# EAGLE board tiny_v (EAGLE 4.11)
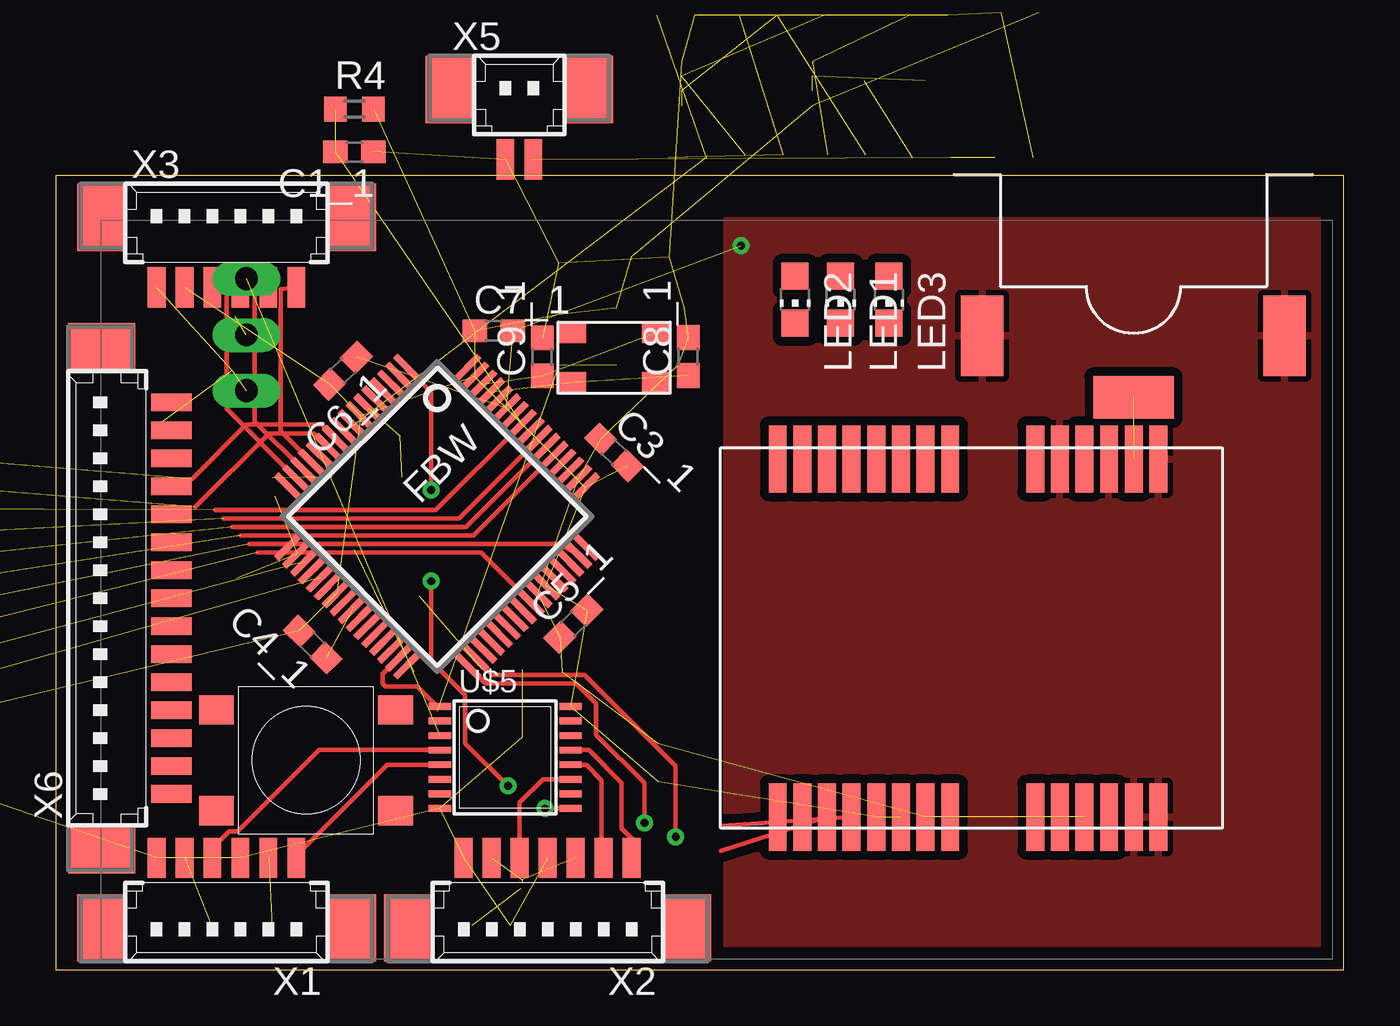
[diagram p0: board, top side]
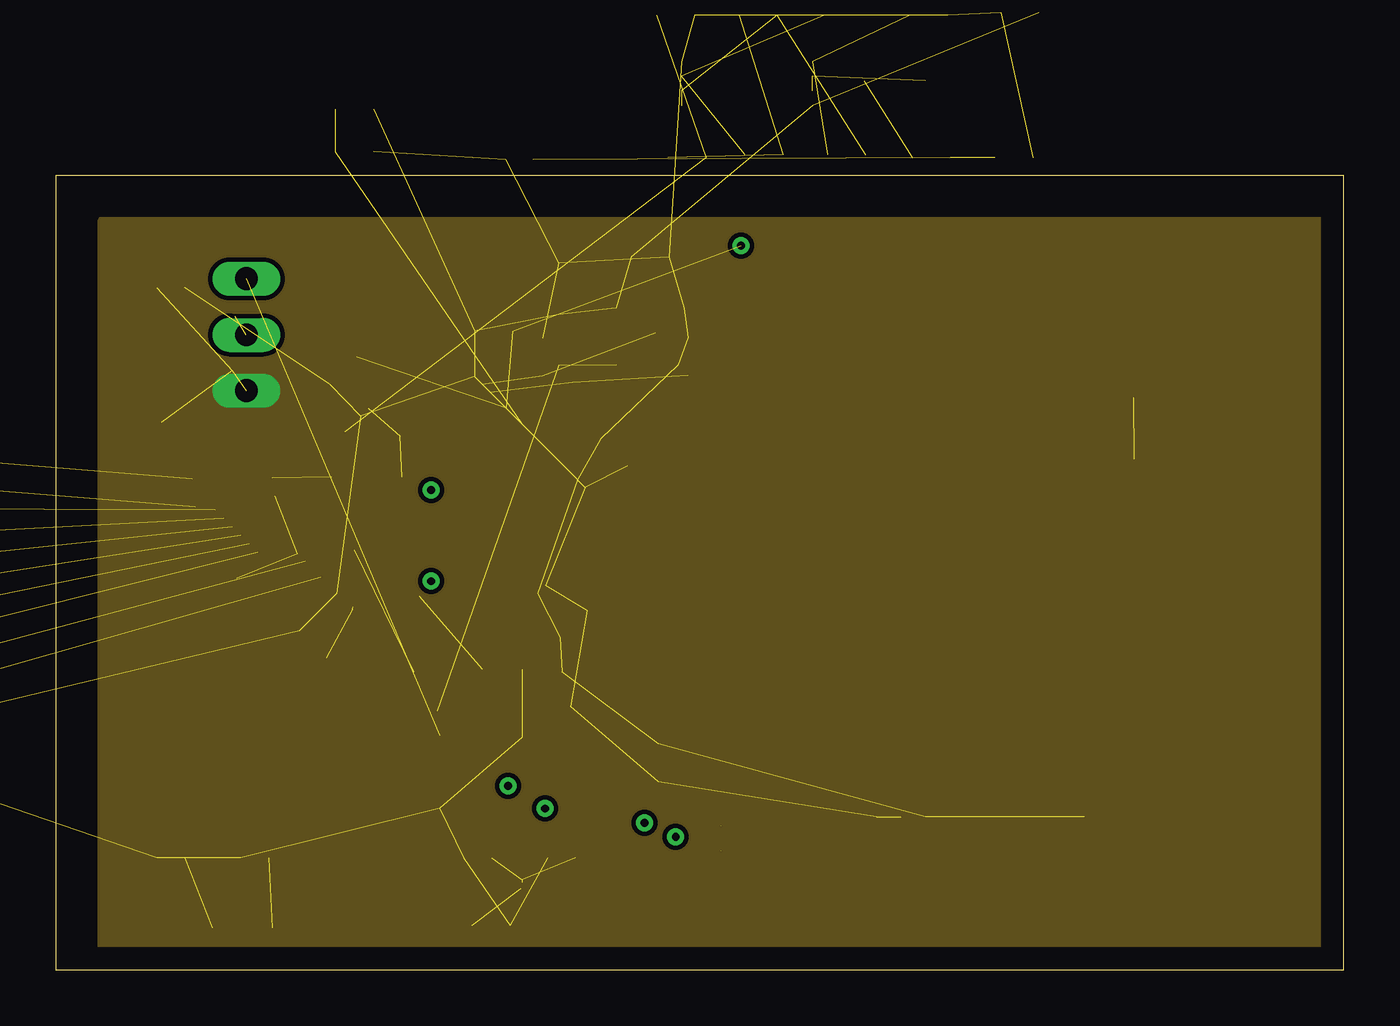
[diagram p1: board, inner layer Route2]
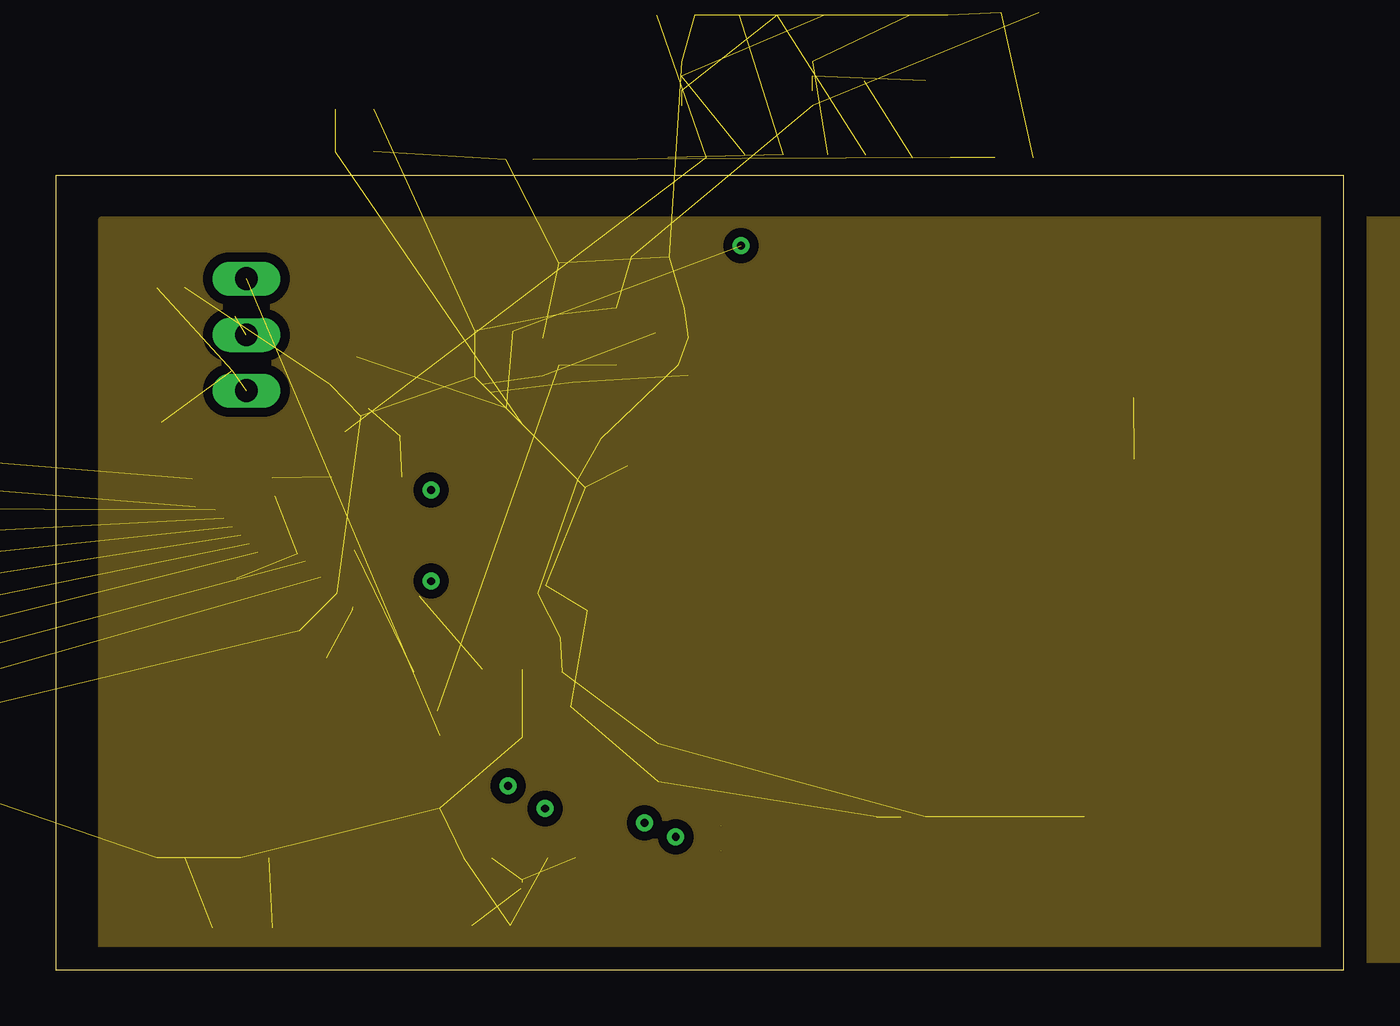
[diagram p2: board, inner layer Route15]
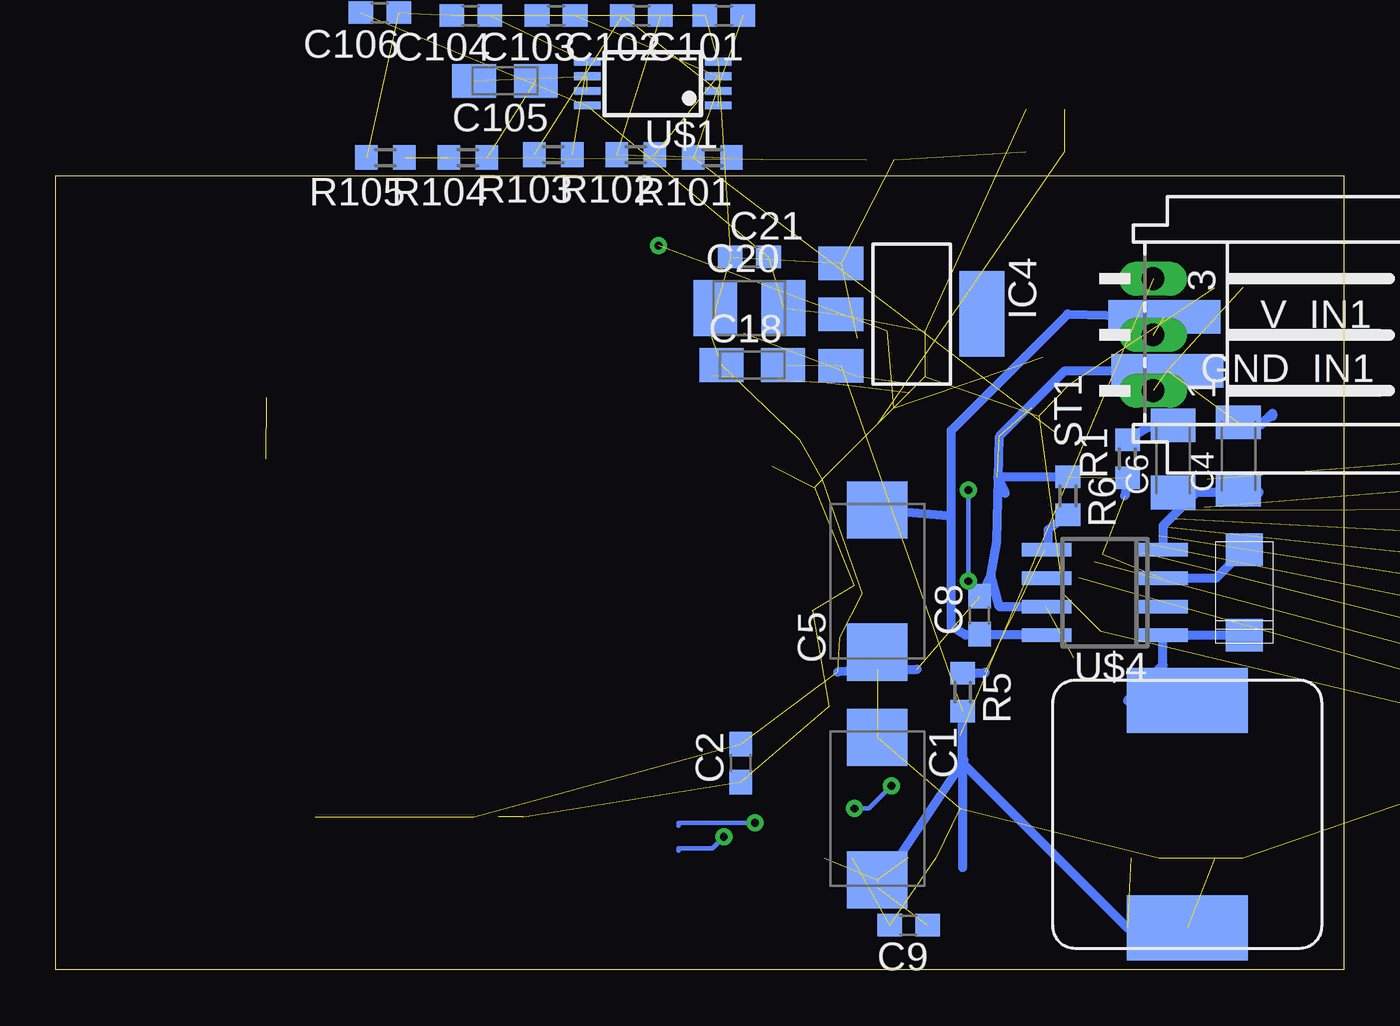
[diagram p3: board, bottom side, seen from below]

Size 57.51 x 35.48 mm. Coordinates in mm from the lower left corner, seen from the top.
Outline: 0,0 57.51,0 57.51,35.48 0,35.48 0,0
Copper layers (1*16): Top 0.035mm / dielectric 1.5mm / Bottom 0.035mm
Design rules "default": minimum track width 10mil, minimum drill 24mil, track to track 8mil, track to pad 8mil, pad to pad 8mil, via to via 8mil, smd to smd 8mil, copper to edge 40mil, drill to drill 8mil, minimum pad ring 10mil, minimum via ring 8mil, stop-mask expansion 4mil, vias tented up to drill 0mil, thermal gap 10mil

## Footprints (pad centres in the part's own frame; a part is rotated, then mirrored left to right if it is on the bottom)
D/7343-31R = smd 2.55 x 2.7: + 3.175,0; - -3.175,0
C0603 = smd 1.1 x 1: 1 -0.85,0; 2 0.85,0
C1206K = smd 1.5 x 2: 1 -1.5,0; 2 1.5,0
A/3216-18R = smd 1.95 x 1.5: + 1.375,0; - -1.375,0
B/3528-21R = smd 1.95 x 2.5: + 1.525,0; - -1.525,0
SQFP-S-10X10-64 = smd 0.3 x 1.6: 1 -3.75,-5.6; 2 -3.25,-5.6; 3 -2.75,-5.6; 4 -2.25,-5.6; 5 -1.75,-5.6; 6 -1.25,-5.6; 7 -0.75,-5.6; 8 -0.25,-5.6; 9 0.25,-5.6; 10 0.75,-5.6; 11 1.25,-5.6; 12 1.75,-5.6; 13 2.25,-5.6; 14 2.75,-5.6; 15 3.25,-5.6; 16 3.75,-5.6; 33 3.75,5.6; 34 3.25,5.6; 35 2.75,5.6; 36 2.25,5.6; 37 1.75,5.6; 38 1.25,5.6; 39 0.75,5.6; 40 0.25,5.6; 41 -0.25,5.6; 42 -0.75,5.6; 43 -1.25,5.6; 44 -1.75,5.6; 45 -2.25,5.6; 46 -2.75,5.6; 47 -3.25,5.6; 48 -3.75,5.6 | smd 1.6 x 0.3: 17 5.6,-3.75; 18 5.6,-3.25; 19 5.6,-2.75; 20 5.6,-2.25; 21 5.6,-1.75; 22 5.6,-1.25; 23 5.6,-0.75; 24 5.6,-0.25; 25 5.6,0.25; 26 5.6,0.75; 27 5.6,1.25; 28 5.6,1.75; 29 5.6,2.25; 30 5.6,2.75; 31 5.6,3.25; 32 5.6,3.75; 49 -5.6,3.75; 50 -5.6,3.25; 51 -5.6,2.75; 52 -5.6,2.25; 53 -5.6,1.75; 54 -5.6,1.25; 55 -5.6,0.75; 56 -5.6,0.25; 57 -5.6,-0.25; 58 -5.6,-0.75; 59 -5.6,-1.25; 60 -5.6,-1.75; 61 -5.6,-2.25; 62 -5.6,-2.75; 63 -5.6,-3.25; 64 -5.6,-3.75
NAPPE_1 = smd 5 x 1.5: P$1 0,0
SOT223 = smd 1.499 x 2.007: 1 -2.261,-3.15; 2 0.025,-3.15; 3 2.311,-3.15 | smd 3.81 x 2.007: 4 0,3.15
WE_PD = smd 2.9 x 5.4: P$1 -5.08,0; P$2 5.08,0
CHIP-LED0805 = smd 1.2 x 1.2: A 0,-1.05; C 0,1.05
R0603 = smd 1 x 1.1: 1 -0.85,0; 2 0.85,0
MSFW3 = drill 1.016 long: 1 0,1.905; 2 2.489,1.905; 3 5.004,1.905
B3S = smd 1.55 x 1.3: P$1 4,-2.25; P$2 -4,-2.25; P$3 4,2.25; P$4 -4,2.25
TSSOP8 = smd 0.35 x 1.2: 1 -0.975,-2.925; 2 -0.325,-2.925; 3 0.325,-2.925; 4 0.975,-2.925; 5 0.975,2.925; 6 0.325,2.925; 7 -0.325,2.925; 8 -0.975,2.925
SMA = smd 1.45 x 1.65: P$1 -1.905,0; P$2 1.905,0
SO08 = smd 0.6 x 2.2: 1 -1.905,-2.6; 2 -0.635,-2.6; 3 0.635,-2.6; 4 1.905,-2.6; 5 1.905,2.6; 6 0.635,2.6; 7 -0.635,2.6; 8 -1.905,2.6
TSSOP16 = smd 0.305 x 0.991: 1 -2.275,-2.918; 2 -1.625,-2.918; 3 -0.975,-2.918; 4 -0.325,-2.918; 5 0.325,-2.918; 6 0.975,-2.918; 7 1.625,-2.918; 8 2.275,-2.918; 9 2.275,2.918; 10 1.625,2.918; 11 0.975,2.918; 12 0.325,2.918; 13 -0.325,2.918; 14 -0.975,2.918; 15 -1.625,2.918; 16 -2.275,2.918
LEA-LA = smd 3 x 0.8: 1 8,-8.65; 2 8,-7.55; 3 8,-6.45; 4 8,-5.35; 5 8,-4.25; 6 8,-3.15; 7 8,-2.05; 8 8,-0.95; 9 8,2.85; 10 8,3.95; 11 8,5.05; 12 8,6.15; 13 8,7.25; 14 8,8.35; 15 -8,8.35; 16 -8,7.25; 17 -8,6.15; 18 -8,5.05; 19 -8,3.95; 20 -8,2.85; 21 -8,-0.95; 22 -8,-2.05; 23 -8,-3.15; 24 -8,-4.25; 25 -8,-5.35; 26 -8,-6.45; 27 -8,-7.55; 28 -8,-8.65
GEOHELIX_SMP = smd 3.6 x 1.9: P$1 -7.2,6.75; P$3 -7.2,-6.75 | smd 1.9 x 3.6: P$2 -9.95,0
CTS_CRYSTAL = smd 1.2 x 0.9: P$1 -1.85,-1.1; P$2 1.85,-1.1; P$3 1.85,1.1; P$4 -1.85,1.1
53398-06 = smd 0.8 x 1.8: 1 3.125,-2.5; 2 1.875,-2.5; 3 0.625,-2.5; 4 -0.625,-2.5; 5 -1.875,-2.5; 6 -3.125,-2.5 | smd 2.1 x 3: S1 5.625,0.625; S2 -5.625,0.625
53398-07 = smd 0.8 x 1.8: 1 3.75,-2.5; 2 2.5,-2.5; 3 1.25,-2.5; 4 0,-2.5; 5 -1.25,-2.5; 6 -2.5,-2.5; 7 -3.75,-2.5 | smd 2.1 x 3: S1 6.25,0.625; S2 -6.25,0.625
53398-12 = smd 0.8 x 1.8: 1 6.875,-2.5; 2 5.625,-2.5; 3 4.375,-2.5; 4 3.125,-2.5; 5 1.875,-2.5; 6 0.625,-2.5; 7 -0.625,-2.5; 8 -1.875,-2.5; 9 -3.125,-2.5; 10 -4.375,-2.5; 11 -5.625,-2.5; 12 -6.875,-2.5 | smd 2.1 x 3: S1 9.375,0.625; S2 -9.375,0.625
53398-02 = smd 0.8 x 1.8: 1 0.625,-2.5; 2 -0.625,-2.5 | smd 2.1 x 3: S1 3.125,0.625; S2 -3.125,0.625
53398-15 = smd 0.8 x 1.8: 1 8.75,-2.5; 2 7.5,-2.5; 3 6.25,-2.5; 4 5,-2.5; 5 3.75,-2.5; 6 2.5,-2.5; 7 1.25,-2.5; 8 0,-2.5; 9 -1.25,-2.5; 10 -2.5,-2.5; 11 -3.75,-2.5; 12 -5,-2.5; 13 -6.25,-2.5; 14 -7.5,-2.5; 15 -8.75,-2.5 | smd 2.1 x 3: S1 11.25,0.625; S2 -11.25,0.625

## Placement (x,y rotation side)
C1  330uF/10V  [D/7343-31R]  20.82,7.2 270 bottom
C1_1  100nF  [C0603]  13.33,36.54 180 top
C2  100nF  [C0603]  26.92,9.23 90 bottom
C3_1  100nF  [C0603]  24.92,23.11 315 top
C4  220pF/50V  [C1206K]  4.69,22.95 90 bottom
C4_1  100nF  [C0603]  11.46,14.53 135 top
C5  47uF/16V  [D/7343-31R]  20.82,17.36 90 bottom
C5_1  100nF  [C0603]  23.11,15.46 45 top
C6  22nF/50V  [C1206K]  7.62,22.82 90 bottom
C6_1  100nF  [C0603]  12.82,26.76 225 top
C7_1  100nF  [C0603]  19.55,28.54 0 top
C8  100nF  [C0603]  16.25,15.84 90 bottom
C8_1  13pF  [C0603]  28.24,27.39 90 top
C9  100nF  [C0603]  19.43,1.99 180 bottom
C9_1  13pF  [C0603]  21.73,27.38 90 top
C18  [A/3216-18R]  26.41,27.01 0 bottom
C20  [B/3528-21R]  26.54,29.55 0 bottom
C21  100nF  [C0603]  26.54,31.84 0 bottom
C101  3,3nF  [C0603]  27.68,42.63 180 bottom  (outside the outline)
C102  220pF  [C0603]  31.36,42.63 180 bottom  (outside the outline)
C103  100pF  [C0603]  35.17,42.63 180 bottom  (outside the outline)
C104  1nF  [C0603]  38.98,42.63 180 bottom  (outside the outline)
C105  10µF  [A/3216-18R]  37.46,39.71 180 bottom  (outside the outline)
C106  100nF  [C0603]  43.05,42.76 180 bottom  (outside the outline)
FBW  LPC2148  [SQFP-S-10X10-64]  17.03,20.24 225 top
GND_IN1  NAP11  [NAPPE_1]  7.87,26.76 180 bottom
IC4  REG1117  [SOT223]  19.3,29.3 270 bottom
L1  15uH  [WE_PD]  6.98,6.95 270 bottom
LED1  [CHIP-LED0805]  35.05,29.93 180 top
LED2  [CHIP-LED0805]  33.02,29.93 180 top
LED3  [CHIP-LED0805]  37.21,29.93 180 top
R1  4.7K  [R0603]  9.65,22.82 90 bottom
R4  10k  [R0603]  13.33,38.44 0 top
R5  10K  [R0603]  17.01,12.41 270 bottom
R6  3.3K  [R0603]  12.31,21.17 270 bottom
R101  100k  [R0603]  28.19,36.28 180 bottom
R102  56k  [R0603]  31.62,36.41 180 bottom
R103  12k  [R0603]  35.3,36.41 180 bottom
R104  56k  [R0603]  39.11,36.28 180 bottom
R105  56k  [R0603]  42.79,36.28 180 bottom
ST1  MSFW3  [MSFW3]  6.6,25.87 90 bottom
SW1  B3S  [B3S]  11.17,9.36 0 top
U$1  AD8552RU  [TSSOP8]  30.86,39.59 90 bottom  (outside the outline)
U$2  STPS2L  [SMA]  4.44,16.85 270 bottom
U$4  L5973D  [SO08]  10.66,16.85 90 bottom
U$5  CD4015B  [TSSOP16]  20.06,9.49 270 top
U$6  LEA-4P  [LEA-LA]  40.89,14.82 270 top
U$8  GEOHELIX  [GEOHELIX_SMP]  48.13,35.52 90 top
U$19  CRYSTAL_CTS  [CTS_CRYSTAL]  24.93,27.34 0 top
V_IN1  NAP11  [NAPPE_1]  8,29.17 180 bottom
X1  [53398-06]  7.62,2.5 180 top
X2  [53398-07]  21.97,2.5 180 top
X3  [53398-06]  7.62,32.98 0 top
X4  [53398-12]  -10.67,16.22 90 top  (outside the outline)
X5  [53398-02]  20.7,38.7 0 top
X6  [53398-15]  2.66,16.6 90 top

## Library data of the parts
C1 C1_1 C2 C3_1 C4 C4_1 C5 C5_1 C6 C6_1 C7_1 C8 C8_1 C9 C9_1 C18 C20 C21 C101-C106 R1 R4-R6 R101-R105 = rcl
FBW L1 SW1 U$1 U$2 U$4-U$6 U$8 U$19 = paparazzi
GND_IN1 V_IN1 = misc_datalogger
IC4 = burr-brown
LED1-LED3 = led
ST1 = con-lumberg
X1-X6 = con-molex

## Nets
+3V3: C2.1 C3_1.2 C4_1.2 C5_1.2 C6_1.2 C7_1.1 C20.+ C21.2 C106.2 FBW.7 FBW.23 FBW.43 FBW.49 FBW.51 FBW.63 IC4.2 R4.2 U$1.8 U$5.16 U$6.5 U$6.6 X3.5 X4.11
+5V: C1.+ C9.1 C18.+ IC4.3 L1.P$2 R5.2 X1.2 X1.5 X2.2 X2.5
ADC_0: FBW.13 X3.1
ADC_1: FBW.14 X3.2
ADC_2: FBW.15 X3.3
ADC_3: X3.4
AGND: C6_1.1 C7_1.2 FBW.59 U$6.13 U$6.14 U$6.15 U$6.17 U$6.19 U$8.P$1 U$8.P$3
AUDIO_OUT: C101.1 FBW.9 R101.2
AUDIO_TX: R104.2 R105.1 X5.1
GND: C1.- C1_1.1 C2.2 C3_1.1 C4.2 C4_1.1 C5.- C5_1.1 C8.2 C8_1.2 C9.2 C9_1.2 C18.- C20.- C21.1 C101.2 C103.2 C104.2 C106.1 FBW.6 FBW.18 FBW.25 FBW.42 FBW.50 GND_IN1.P$1 IC4.1 R1.1 R6.1 R105.2 ST1.1 U$1.4 U$2.P$1 U$4.3 U$4.7 U$5.8 U$6.7 U$6.11 X1.1 X1.4 X2.1 X2.4 X3.6 X4.12 X5.2
LPC_CLOCK: C8_1.1 FBW.61 U$19.P$1
LPC_MISO: FBW.53 X4.6
LPC_MOSI: FBW.54 X4.5
LPC_P0.14: FBW.41 X4.8
LPC_PWM_2: FBW.31 U$5.1
LPC_PWM_5: FBW.1 U$5.9
LPC_RESET: C1_1.2 FBW.57 R4.1 X4.3
LPC_RXD_0: FBW.21 X4.10
LPC_RXD_1: FBW.34 U$6.3
LPC_SCK: FBW.47 X4.7
LPC_SSEL: FBW.55 X4.4
LPC_TXD_0: FBW.19 X4.9
LPC_TXD_1: FBW.33 U$6.4
LPC_USB_N: FBW.11 X4.2
LPC_USB_P: FBW.10 X4.1
N$1: FBW.35
N$2: FBW.39
N$3: U$6.16 U$8.P$2
N$4: FBW.38
N$5: C9_1.1 FBW.62 U$19.P$3
N$6: C4.1 C6.1 U$4.4
N$7: FBW.45
N$8: C6.2 R1.2
N$9: L1.P$1 U$2.P$2 U$4.1
N$10: R5.1 R6.2 U$4.5
N$11: FBW.27
N$12: FBW.29
N$13: FBW.30
N$14: C105.+ U$1.6 U$1.7
N$15: C102.2 R103.2 U$1.1 U$1.2
N$16: C102.1 R101.1 R102.2
N$17: C103.1 R102.1 U$1.3
N$18: C105.- R104.1
N$19: C104.1 R103.1 U$1.5
N$20: FBW.2
SERV_0: U$5.5 X1.6
SERV_1: U$5.4 X1.3
SERV_2: ST1.3 U$5.3
SERV_3: U$5.10
SERV_4: U$5.13 X2.7
SERV_5: U$5.12 X2.6
SERV_6: U$5.11 X2.3
SERV_7: U$5.2
VBAT: C5.+ C8.1 ST1.2 U$4.8 V_IN1.P$1
VCC_RF: U$6.18
VDD18OUT: U$6.8

## Tracks (layer width: path | path; a pad name or v marks a point on that pad's centre or on a via)
+3V3  (22 unrouted)
  pour Route15 (isolate 0.406): 2.03,0.47 62.73,0.47 62.73,33.49 2.03,33.49
+5V  (8 unrouted)
  Bottom 0.406: L1.P$2 9.65,1.87 17.01,9.23 | 17.01,9.23 17.01,11.52 | 17.01,9.23 16.95,9.36 20.76,3.64 20.82,3.9 | 17.01,11.52 R5.2 | 17.01,11.52 17.01,4.57
ADC_0
  Top 0.203: X3.1 10.03,30.4 10.03,24.06 FBW.13
ADC_1
  Top 0.203: X3.2 8.88,30.45 8.88,24.5 FBW.14
ADC_2
  Top 0.203: X3.3 7.62,30.47 7.62,25.06 FBW.15
AGND  (via drill 0.35)  (3 unrouted)
  other vias: 30.6,32.35
  pour Top (isolate 0.406): 29.97,33.49 57.27,33.49 57.27,0.47 29.97,0.47
AUDIO_OUT  (2 unrouted)
AUDIO_TX  (2 unrouted)
GND  (40 unrouted)
  Bottom 0.406: U$4.3 5.71,17.49 U$2.P$1 | GND_IN1.P$1 12.44,26.76 15.36,23.84 15.49,19.14 15.74,17.61 | U$4.7 15.36,16.22 15.74,17.61 | R6.1 15.45,22.02 15.11,21.3 | 20.82,13.42 22.6,13.3 | 20.82,13.42 19.05,13.42 | C5.- 20.82,13.42 | R1.1 9.77,21.17 | C4.2 3.68,24.35 3.17,24.85 3.17,24.73 | 15.74,17.61 C8.2
  pour Route2 (no thermals): 2.03,33.49 62.73,33.49 62.73,0.47 2.03,0.47
LPC_CLOCK  (2 unrouted)
LPC_MISO  (1 unrouted)
  Top 0.203: 8.25,19.39 18.66,19.39 18.66,19.4 FBW.53
LPC_MOSI  (1 unrouted)
  Top 0.203: FBW.54 18.33,19.77 7.87,19.77
LPC_P0.14  (1 unrouted)
  Top 0.203: FBW.41 19,18.63 9.01,18.63
LPC_PWM_2
  Top 0.203: U$5.1 17.02,11.76 16.12,12.66 14.73,12.66 14.6,12.79 14.6,13.22 FBW.31
LPC_PWM_5  (via drill 0.35)
  Top 0.203: FBW.1 16.76,25.82 v16.76,21.43 | U$5.9 21.85,7.21 v21.84,7.2 | v20.19,8.22 18.28,10.12 18.28,12.28 16.76,13.8 v16.76,17.36
  Bottom 0.203: v16.76,17.36 v16.76,21.43 | v21.84,7.2 21.2,7.2 v20.19,8.22
LPC_RESET  (3 unrouted)
  Top 0.203: FBW.57 16.97,20.54 7.11,20.54
LPC_RXD_0  (1 unrouted)
LPC_RXD_1  (via drill 0.35)  (1 unrouted)
  Top 0.203: FBW.34 19.51,13.17 23.62,13.17 27.68,9.11 v27.68,5.93 | 29.71,5.32 U$6.3
  Bottom 0.203: 29.71,5.32 29.71,5.42 28.19,5.42 v27.68,5.93
LPC_SCK  (1 unrouted)
  Top 0.203: FBW.47 22.48,19.01 8.63,19.01
LPC_SSEL  (1 unrouted)
  Top 0.203: FBW.55 18,20.15 7.49,20.15
LPC_TXD_0  (1 unrouted)
LPC_TXD_1  (via drill 0.35)  (1 unrouted)
  Top 0.203: FBW.33 19.18,12.79 23.24,12.79 24.12,11.9 24.12,10.5 26.28,8.34 v26.28,6.57 | 29.71,6.42 U$6.4
  Bottom 0.203: 29.71,6.42 29.71,6.57 v26.28,6.57
LPC_USB_N  (1 unrouted)
  Top 0.203: FBW.11 11.54,23.96 9.52,23.96 6.22,20.66
LPC_USB_P  (1 unrouted)
  Top 0.203: FBW.10 11.87,24.35 8.5,24.35 6.09,21.93
N$3  (1 unrouted)
N$5  (2 unrouted)
N$6
  Bottom 0.406: U$4.4 8.06,19.83 6.6,21.3 C6.1 3.83,21.32 3.8,21.3 3.78,21.32 C4.1
N$8
  Bottom 0.406: R1.2 8.76,24.22 8.4,24.32 C6.2
N$9
  Bottom 0.406: U$2.P$2 U$4.1 8.06,13.61 9.65,12.03 L1.P$1
N$10  (1 unrouted)
  Bottom 0.406: U$4.5 13.33,18.76 13.2,18.89 13.2,19.65 R6.2 | R5.1 16.04,13.26 16,13.3
N$14  (2 unrouted)
N$15  (3 unrouted)
N$16  (2 unrouted)
N$17  (2 unrouted)
N$18  (1 unrouted)
N$19  (2 unrouted)
SERV_0
  Top 0.203: X1.6 10.74,5.12 14.78,9.16 U$5.5
SERV_1
  Top 0.203: X1.3 6.99,5.03 6.98,5.04 6.98,5.42 7.74,6.19 8.12,6.19 11.75,9.81 U$5.4
SERV_2  (1 unrouted)
SERV_4
  Top 0.203: U$5.13 23.8,9.81 25.27,8.34 25.27,6.31 25.78,5.8 25.78,5.04 25.74,5 X2.7
SERV_5
  Top 0.203: U$5.12 23.69,9.16 24.38,8.47 24.38,5.04 24.42,5 X2.6
SERV_6
  Top 0.203: X2.3 20.72,7.48 21.75,8.51 U$5.11
VBAT  (1 unrouted)
  Bottom 0.406: C5.+ 17.66,20.27 17.52,20.41 | 17.52,20.41 17.52,24.09 12.31,29.3 V_IN1.P$1 | 17.52,20.41 17.52,15.33 16.89,14.95 | U$4.8 16.89,14.95 | 16.89,14.95 C8.1